# Altium PCB CP17E0276.PcbDoc (part 2 of 2)
Units mil, origin at the board's own origin, x right, y up, seen from the top; angles counter-clockwise.
Board outline 1745 x 3124.58 mil, 4 copper layers (Top Layer, Signal Layer 1, Signal Layer 2, Bottom Layer), stack 63.668 mil thick; 133 components, 83 nets, 411 pads, 139 vias.
Unrouted connection lines stored in the file: 11.
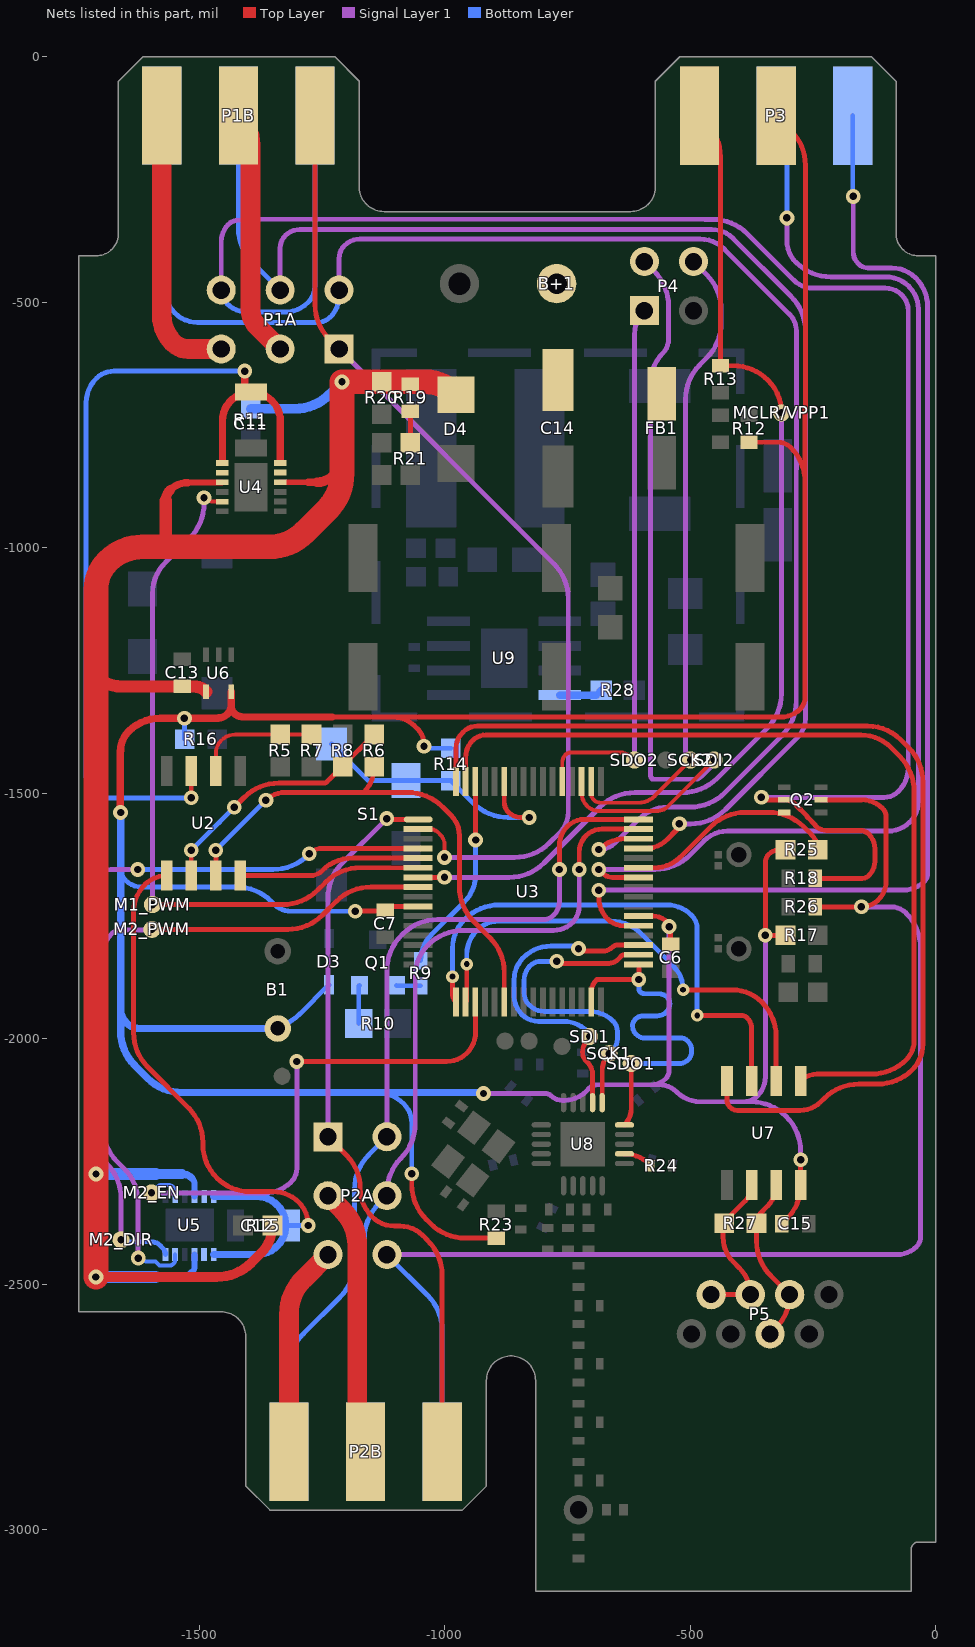
[diagram p4: the nets of this part, all layers, seen from the top]

## Via types
v1: diameter 30, hole 15, Top Layer to Bottom Layer, tented both sides, 94 vias
v2: diameter 25, hole 15, Top Layer to Bottom Layer, 16 vias
v3: diameter 30, hole 15, Top Layer to Bottom Layer, tented bottom, 14 vias
v4: diameter 30, hole 15, Top Layer to Bottom Layer, 6 vias
v5: diameter 24, hole 12, Top Layer to Bottom Layer, 5 vias
v6: diameter 25.59, hole 11.81, Top Layer to Bottom Layer, tented both sides, 4 vias

## Nets (pads, with @x,y where several pads share a name; then routed paths per layer and width w, separated by ;. In a path a pad name is that pad's centre, name@x,y a point inside that pad or via, vN(x,y) a via of type N, cw(c..) or ccw(c..) an arc to the next point about the centre after c; other vN are vias at no path point) (continued)
NetM1_PWM_0: M1_PWM.0 U3.6 U4.5 | length 1472.9
  Top Layer w8: v1(-1490,-898) ccw(c-1470.93,-878.93) -1470.93,-905.9 U4.5@-1453.07,-905.9
  Top Layer w10: M1_PWM.0@-1598,-1726.46 v3(-1595,-1726.46) -1329.68,-1726.46 ccw(c-1329.68,-1626.46) -1258.97,-1697.17 -1242.41,-1680.6 cw(c-1171.7,-1751.31) -1171.7,-1651.31 U3.6@-1053.82,-1651.31
  Signal Layer 1 w10: v3(-1595,-1726.46) -1595,-1093.18 cw(c-1505.24,-1093.18) -1568.71,-1029.71 -1519.29,-980.29 ccw(c-1590,-909.58) -1490,-909.58 v1(-1490,-898) v1@-1487.6,-900.4
NetM1H1_0: M1H1.0 P1A.4 P1B.4 U3.46 | length 3272.7
  Top Layer w10: v1(-686,-1614.34) cw(c-632.69,-1667.64) -632.69,-1592.26 U3.46@-605,-1592.26
  Signal Layer 1 w10: P1A.4@-1215,-475 -1215,-410.54 cw(c-1177.82,-410.54) -1204.11,-384.25 cw(c-1172.13,-416.23) -1172.13,-371 -479.94,-371 cw(c-479.94,-440.86) -430.54,-391.46 -298.03,-523.97 cw(c-332.89,-558.83) -283.59,-558.83 -284,-1125 -284,-1311.59 cw(c-384,-1311.59) -313.29,-1382.3 -429.49,-1498.5 cw(c-500.2,-1427.79) -500.2,-1527.79 -544.41,-1527.79 ccw(c-544.41,-1613.47) -605,-1552.89 -652.63,-1600.51 cw(c-686,-1567.14) v1(-686,-1614.34)
  Bottom Layer w10: P1B.4@-1576.04,-119.73 -1576.04,-456.81 ccw(c-1483.85,-456.81) -1549.04,-522 ccw(c-1503.17,-476.13) -1503.17,-541 -1259.56,-541 ccw(c-1259.56,-503.44) -1233,-530 ccw(c-1276.46,-486.54) -1215,-486.54 P1A.4@-1215,-475
NetM1H2_0: M1H2.0 P1A.5 P1B.5 U3.45 | length 2911
  Top Layer w10: U3.45@-605,-1611.94 -590.53,-1611.94 ccw(c-590.53,-1550.69) -547.22,-1594 -526.79,-1573.57 ccw(c-538.37,-1562) v1(-522,-1562)
  Signal Layer 1 w10: P1A.5@-1335,-475 -1335,-389.39 cw(c-1299.01,-389.39) -1324.46,-363.94 cw(c-1294.63,-393.78) -1294.63,-351.59 -1279.74,-351.59 -493.72,-351.55 -456.16,-351.55 cw(c-456.16,-412.3) -413.21,-369.34 -294.46,-488.09 cw(c-365.17,-558.8) -265.17,-558.8 -265.17,-1347.44 cw(c-319.1,-1347.44) -280.97,-1385.58 -428.1,-1532.71 cw(c-498.81,-1462) -498.81,-1562 v1(-522,-1562)
  Bottom Layer w10: P1B.5@-1420.06,-119.73 -1420.06,-348.52 ccw(c-1320.06,-348.52) -1390.77,-419.23 P1A.5@-1335,-475
NetM1HP_0: M1HP.0 P1A.1 P1B.1 U3.2 | length 2018.3
  Top Layer w8: U3.2@-1053.82,-1572.57 -1030.94,-1572.57 cw(c-1030.94,-1597.94) -1013.01,-1579.99 ; -1013,-1580 -1008.71,-1584.29 cw(c-1028.72,-1604.31) -1000.42,-1604.31 v1(-1000.42,-1630.31)
  Top Layer w10: P1B.1@-1264.07,-119.73 -1264.07,-504.51 ccw(c-1164.07,-504.51) -1234.78,-575.22 P1A.1@-1215,-595
  Signal Layer 1 w10: P1A.1@-1215,-595 -777.59,-1032.41 cw(c-848.3,-1103.12) -748.3,-1103.12 -748.3,-1537.95 cw(c-807.77,-1537.95) -765.72,-1580 -786.74,-1601.02 cw(c-857.45,-1530.31) -857.45,-1630.31 v1(-1000.42,-1630.31)
NetM2_0: M2.0 R6.1 U2.7 U3.22 | length 1063.6
  Top Layer w10: U2.7@-1466,-1667.3 v1(-1466,-1616) ; v1(-1364,-1514) cw(c-1325.54,-1552.46) -1325.54,-1498.07 -1165,-1498.07 ; R6.1@-1143.55,-1446 -1143.55,-1446.28 cw(c-1216.79,-1446.28) -1165,-1498.07 ; U3.22@-878.62,-1924.93 -878.62,-1864.4 ccw(c-978.62,-1864.4) -907.91,-1793.69 -940.71,-1760.89 cw(c-870,-1690.18) -970,-1690.18 -970,-1585.89 ccw(c-1028.14,-1585.89) -987.03,-1544.78 -1004.45,-1527.36 ccw(c-1075.16,-1598.07) -1075.16,-1498.07 -1165,-1498.07
  Bottom Layer w10: v1(-1466,-1616) v1(-1364,-1514)
NetM2_DIR_0: M2_DIR.0 U3.4 U5.6 | length 1534.2
  Top Layer w10: v1(-1276,-1623) cw(c-1249.3,-1649.7) -1249.3,-1611.94 U3.4@-1053.82,-1611.94
  Signal Layer 1 w10: v3(-1659.12,-2409) -1659.12,-2324.31 ccw(c-1759.12,-2324.31) -1688.41,-2253.59 -1693,-2249 cw(c-1627.82,-2183.82) -1720,-2183.82 -1720,-1706.38 cw(c-1660.93,-1706.38) -1702.7,-1664.61 cw(c-1679.49,-1687.82) -1679.49,-1655 v1@-1628,-1655
  Bottom Layer w10: v3(-1659.12,-2409) ccw(c-1649.46,-2399.34) -1649.46,-2413 -1597.16,-2413 cw(c-1597.16,-2437.53) -1579.82,-2420.18 -1574.03,-2425.97 cw(c-1587.01,-2438.95) U5.6@-1568.66,-2438.95 ; v1@-1628,-1655 v1(-1625,-1655) -1349.42,-1655 ccw(c-1349.42,-1555) -1278.71,-1625.71 v1(-1276,-1623)
NetM2_EN_0: M2_EN.0 U3.19 U5.8 | length 1087.7
  Top Layer w8: U3.19@-937.68,-1942.26 U3.19@-937.68,-1924.93
  Top Layer w10: v1(-1301,-2046) -996.04,-2046 ccw(c-996.04,-1987.96) -955,-2029 ccw(c-998.82,-1985.18) -936.85,-1985.18 U3.19@-936.85,-1924.93
  Signal Layer 1 w10: v3(-1597,-2313.49) -1365.92,-2313.49 ccw(c-1365.92,-2238.07) -1312.59,-2291.4 ccw(c-1340.56,-2263.42) -1301,-2263.42 v1(-1301,-2046)
  Bottom Layer w8: v3(-1597,-2313.49) -1583.81,-2300.3 ; -1583.8,-2300.29 cw(c-1577.34,-2306.76) -1577.34,-2297.62 -1562.58,-2297.62 cw(c-1562.58,-2312.58) -1552,-2302 cw(c-1559.7,-2309.7) -1548.81,-2309.7 U5.8@-1548.81,-2320.88
NetM2_ID_0: M2_ID.0 Q2.3 R25.2 U3.43 | length 440.2
  Top Layer w10: U3.43@-605,-1651.31 -572.5,-1651.31 ccw(c-572.5,-1577.41) -520.24,-1629.66 -458.46,-1567.88 cw(c-387.75,-1638.59) -387.75,-1538.59 -339.83,-1538.59 cw(c-339.83,-1638.59) -269.12,-1567.88 -252.72,-1584.28 cw(c-283.43,-1614.99) R25.2@-240,-1614.99
NetM2_PWM_0: M2_PWM.0 U3.8 U5.5 | length 1439.9
  Top Layer w10: v3(-1596.18,-1777) -1319.42,-1777 ccw(c-1319.42,-1677) -1248.71,-1747.71 -1220.97,-1719.97 cw(c-1150.26,-1790.68) -1150.26,-1690.68 U3.8@-1053.82,-1690.68
  Signal Layer 1 w10: v1(-1624.16,-2446.34) -1624.16,-2333.77 ccw(c-1724.16,-2333.77) -1653.45,-2263.06 -1667.71,-2248.8 cw(c-1597,-2178.09) -1697,-2178.09 -1697,-1831.4 cw(c-1632.13,-1831.4) -1678,-1785.53 cw(c-1659.99,-1803.54) -1659.99,-1778.06 -1596.18,-1778.06 v3(-1596.18,-1777)
  Bottom Layer w8: v1(-1624.16,-2446.34) ccw(c-1608.07,-2430.25) -1608.07,-2453 -1591,-2453 cw(c-1591,-2457.14) -1588.07,-2454.21 -1580.54,-2461.74 -1561.62,-2461.74 ccw(c-1561.62,-2448.36) -1552.16,-2457.82 ccw(c-1559.86,-2450.13) -1548.97,-2450.13 U5.5@-1548.97,-2438.95
NetM2H1_0: M2H1.0 P2A.4 P2B.4 U3.48 | length 1788
  Top Layer w10: v1(-766.3,-1655) -766.3,-1606.36 cw(c-710.64,-1606.36) -750,-1567 cw(c-715.92,-1601.08) -715.92,-1552.89 U3.48@-605,-1552.89
  Signal Layer 1 w10: P2A.4@-1117.67,-2199.21 -1117.67,-1860.03 cw(c-1017.67,-1860.03) -1088.38,-1789.32 -1085.35,-1786.29 cw(c-1014.64,-1857) -1014.64,-1757 -799.73,-1757 ccw(c-799.73,-1726.27) -778,-1748 ccw(c-806.24,-1719.76) -766.3,-1719.76 v1(-766.3,-1655)
  Bottom Layer w10: P2B.4@-1317.14,-2840.69 -1317.14,-2671.23 cw(c-1217.14,-2671.23) -1287.85,-2600.52 -1212.87,-2525.54 ccw(c-1283.58,-2454.83) -1183.58,-2454.83 -1183.58,-2306.54 cw(c-1083.58,-2306.54) -1154.29,-2235.83 P2A.4@-1117.67,-2199.21
NetM2H2_0: M2H2.0 P2A.5 P2B.5 U3.47 | length 1671.1
  Top Layer w10: v1(-726,-1655) -726,-1619.45 cw(c-678.69,-1619.45) -712.14,-1586 cw(c-679.72,-1618.42) -679.72,-1572.57 U3.47@-605,-1572.57
  Signal Layer 1 w10: P2A.5@-1117.67,-2319.21 -1117.67,-2311.67 cw(c-1020.78,-2311.67) -1089.29,-2243.16 ccw(c-1160,-2172.45) -1060,-2172.45 -1060,-1871.19 cw(c-972.8,-1871.19) -1034.46,-1809.53 -1033.22,-1808.29 cw(c-962.51,-1879) -962.51,-1779 -778.46,-1779 ccw(c-778.46,-1724.62) -740,-1763.07 ccw(c-773.8,-1729.27) -726,-1729.27 v1(-726,-1655)
  Bottom Layer w10: P2B.5@-1161.15,-2840.69 cw(c-1155.14,-2834.67) -1163.65,-2834.67 -1163.65,-2406.61 cw(c-1063.65,-2406.61) -1134.36,-2335.9 P2A.5@-1117.67,-2319.21
NetM2HP_0: M2HP.0 P2A.1 P2B.1 U3.1 | length 1516.2
  Top Layer w10: P2A.1@-1237.67,-2199.21 -1199.85,-2237.02 cw(c-1266.83,-2304) -1172.11,-2304 ccw(c-1090.02,-2304) -1148.06,-2362.05 ccw(c-1102.31,-2316.29) -1102.31,-2381 -1090.87,-2381 cw(c-1090.87,-2445.87) -1045,-2400 -1034.46,-2410.54 cw(c-1105.17,-2481.25) -1005.17,-2481.25 P2B.1@-1005.17,-2840.69 ; v1(-1118,-1551.3) ccw(c-1114.17,-1547.47) -1114.17,-1552.88 U3.1@-1053.82,-1552.88
  Signal Layer 1 w10: P2A.1@-1237.67,-2199.21 -1237.67,-1712.39 cw(c-1137.67,-1712.39) -1208.38,-1641.67 v1(-1118,-1551.3)
NetMCLR/VPP1_0: MCLR/VPP1.0 P3.1 R13.1 U3.7 | length 2174.6
  Top Layer w10: U3.7@-1053.82,-1670.99 v1(-1000.42,-1671) ; P3.1@-480.91,-119.79 -467.52,-133.18 cw(c-538.23,-203.89) -438.23,-203.89 R13.1@-438.23,-629.08 -412.34,-629.08 cw(c-412.34,-729.08) -341.63,-658.37 -341.5,-658.5 cw(c-407.88,-724.89) v1(-314,-724.89)
  Signal Layer 1 w10: v1(-1000.42,-1671) -868.42,-1671 ccw(c-868.42,-1571) -797.71,-1641.71 -683.65,-1527.65 cw(c-612.94,-1598.36) -612.94,-1498.36 -515.95,-1498.36 ccw(c-515.95,-1398.36) -445.24,-1469.07 -343.29,-1367.12 ccw(c-414,-1296.41) -314,-1296.41 v1(-314,-724.89)
NetP1A_2: P1A.2 P1B.2 U4.11 | length 504.7
  Top Layer w40: P1B.2@-1420.06,-119.73 cw(c-1479.41,-179.08) -1395.47,-179.08 -1395.47,-513.79 ccw(c-1345.4,-513.79) -1380.81,-549.19 P1A.2@-1335,-595
NetP1A_3: P1A.3 P1B.3 U4.2 | length 569.9
  Top Layer w40: P1B.3@-1576.04,-119.73 -1576.04,-526.38 ccw(c-1497.38,-526.38) -1553,-582 ccw(c-1521.62,-550.62) -1521.62,-595 P1A.3@-1455,-595
NetP1A_6: P1A.6 P1B.6 Q2.2 R18.2 | length 3906.9
  Top Layer w10: v1(-355,-1508) ccw(c-342.93,-1495.93) -342.93,-1513 Q2.2@-308.4,-1513 cw(c-308.4,-1545.3) -285.56,-1522.46 -261.81,-1546.2 ccw(c-258.28,-1546.21) -260.77,-1548.71 -246.07,-1563.41 cw(c-248.67,-1566) -245,-1566 ccw(c-222.22,-1543.22) -222.22,-1575.44 -154.37,-1575.44 cw(c-154.37,-1601.26) -136.11,-1583 cw(c-165.33,-1612.23) -124,-1612.23 -124,-1638.03 cw(c-164.97,-1638.03) -136,-1667 cw(c-150.48,-1652.51) -150.48,-1673 R18.2@-245.44,-1673
  Signal Layer 1 w10: P1A.6@-1455,-475 -1455,-376.36 cw(c-1404.99,-376.36) -1440.35,-341 cw(c-1420.34,-361.01) -1420.34,-332.71 -1397.76,-332.71 ; -1397.76,-330.71 -469.96,-331 -454.42,-331 cw(c-454.42,-431) -383.71,-360.29 -289.24,-454.76 ccw(c-250.04,-415.57) -250.04,-471 -102.8,-471 cw(c-102.8,-518.8) -69,-485 cw(c-100.38,-516.38) -56,-516.38 -56,-1447.58 cw(c-124.47,-1447.58) -76.05,-1496 cw(c-105.02,-1467.03) -105.02,-1508 v1(-355,-1508)
  Bottom Layer w10: P1A.6@-1455,-475 ccw(c-1416.37,-475) -1443.69,-502.31 ccw(c-1400.99,-459.62) -1400.99,-520 -1326.48,-520 ccw(c-1326.48,-451.24) -1277.86,-499.86 ccw(c-1310.18,-467.54) -1264.47,-467.54 -1264.47,-120.14 P1B.6@-1264.07,-119.73
NetP2A_2: P2A.2 P2B.2 U5.11 | length 500.8
  Top Layer w40: P2A.2@-1237.67,-2319.21 -1207.43,-2349.45 cw(c-1278.14,-2420.16) -1178.14,-2420.16 P2B.2@-1178.14,-2799.69
NetP2A_3: P2A.3 P2B.3 U5.2 | length 390.4
  Top Layer w40: P2B.3@-1317.14,-2801 -1317.14,-2560.1 cw(c-1217.14,-2560.1) -1287.85,-2489.39 P2A.3@-1237.67,-2439.21
NetP2A_6: P2A.6 P2B.6 Q2.5 R26.1 | length 2765.3
  Top Layer w10: R26.1@-245.44,-1731.01 v1(-151.3,-1731.01) -150.82,-1731.01 ccw(c-150.82,-1683.18) -117,-1717 ccw(c-155.63,-1678.37) -101,-1678.37 -101,-1547.42 ccw(c-124.46,-1547.42) -107.87,-1530.83 ccw(c-150.92,-1573.88) -150.92,-1513 Q2.5@-233.6,-1513
  Signal Layer 1 w10: P2A.6@-1117.67,-2439.21 -78.62,-2439.21 ccw(c-78.62,-2383.17) -39,-2422.8 ccw(c-58.31,-2403.48) -31,-2403.48 -31,-1814.4 ccw(c-131,-1814.4) -60.29,-1743.69 ccw(c-90.91,-1774.31) -90.91,-1731.01 v1(-151.3,-1731.01)
  Bottom Layer w10: P2A.6@-1117.67,-2439.21 -1034.46,-2522.41 cw(c-1105.17,-2593.12) -1005.17,-2593.12 P2B.6@-1005.17,-2840.69
NetP3_4: P3.4 U3.37 | length 2464.6
  Top Layer w10: v1(-686,-1697) -686,-1712.84 ccw(c-625.26,-1712.84) -668.21,-1755.79 ccw(c-635.31,-1722.89) -635.31,-1769.42 U3.37@-605,-1769.42
  Signal Layer 1 w10: v1(-686,-1697) -66.46,-1697 ccw(c-66.46,-1635.54) -23,-1679 ccw(c-38.98,-1663.02) -16.38,-1663.02 -16.38,-509 ccw(c-99.38,-509) -40.69,-450.31 ccw(c-90.08,-499.7) -90.08,-429.85 -138.04,-429.85 cw(c-138.04,-403.04) -157,-422 -158.1,-420.9 cw(c-134.2,-397) -168,-397 v1(-168,-284.19)
  Bottom Layer w10: P3.4@-168.94,-119.79 -168.94,-281.91 ccw(c-165.72,-281.91) v1(-168,-284.19)
NetP3_5: P3.5 U3.42 | length 2344.4
  Top Layer w10: v1(-686,-1655) v1@-678.43,-1662.57 ; v1@-678.42,-1662.58 ccw(c-658.09,-1642.22) -658.09,-1670.99 U3.42@-605,-1670.99
  Signal Layer 1 w10: v1(-686,-1655) -571.65,-1655 ccw(c-571.65,-1555) -500.94,-1625.71 -471.52,-1596.29 cw(c-424.25,-1643.56) -424.25,-1576.71 -96.81,-1576.71 ccw(c-96.81,-1514.09) -52.54,-1558.37 ccw(c-94.18,-1516.73) -35.29,-1516.73 -35.29,-513.75 ccw(c-99.98,-513.75) -54.24,-468 ccw(c-102.52,-516.28) -102.52,-448 -213.58,-448 cw(c-213.58,-348) -284.29,-418.71 -285.17,-417.83 cw(c-242.13,-374.79) -303,-374.79 v1(-303,-328)
  Bottom Layer w10: v1(-303,-328) P3.5@-303,-172.73
NetP4_1: P4.1 SDO2.0 U3.53 | length 1123.7
  Top Layer w8: U3.53@-760.51,-1476.11 -760.51,-1437.12 cw(c-737.72,-1437.12) -753.84,-1421 cw(c-743.37,-1431.47) -743.37,-1416.66 -643.18,-1416.66 cw(c-643.18,-1451.54) SDO2.0@-618.53,-1426.87 ; SDO2.0@-618.52,-1426.88 v3(-613.4,-1432)
  Signal Layer 1 w10: v3(-613.4,-1432) -613.4,-565.64 cw(c-544.62,-565.64) P4.1@-593.25,-517
NetP4_3: P4.3 SDI2.0 U3.51 | length 1581.1
  Top Layer w8: U3.51@-721.14,-1476.11 -721.14,-1499.49 ccw(c-685.33,-1499.49) -710.65,-1524.82 -708.74,-1526.73 ccw(c-687.78,-1505.77) -687.78,-1535.41 -565.98,-1535.41 ccw(c-565.98,-1508.28) -546.79,-1527.46 v3(-451.33,-1432)
  Signal Layer 1 w10: P4.3@-593.25,-417 -573.29,-436.97 cw(c-644,-507.68) -544,-507.68 -544,-575.03 cw(c-584.97,-575.03) -556,-604 ccw(c-495.9,-664.1) -580.89,-664.1 -580.89,-1462.76 ccw(c-571.01,-1462.76) -578,-1469.75 ccw(c-574.65,-1466.4) -574.65,-1471.14 -490.5,-1471.14 ccw(c-490.5,-1453.59) -478.09,-1466 -456.45,-1444.36 ccw(c-468.82,-1432) v3(-451.33,-1432)
NetP4_4: P4.4 SCK2.0 U3.50 | length 1326.7
  Top Layer w8: U3.50@-701.46,-1476.11 -701.46,-1500.38 ccw(c-683.02,-1500.38) -696.06,-1513.42 ccw(c-682.59,-1499.95) -682.59,-1519 -605.94,-1519 ccw(c-605.94,-1470.19) -571.43,-1504.7 cw(c-569.56,-1504.7) -570.88,-1503.38 v3(-499.5,-1432)
  Signal Layer 1 w10: v3@-509.5,-1432 -509.5,-697.66 cw(c-409.5,-697.66) -480.21,-626.95 -466.12,-612.87 ccw(c-536.84,-542.16) -436.84,-542.16 -436.84,-514.84 ccw(c-536.84,-514.84) -466.12,-444.13 P4.4@-493.25,-417
NetP5_1: P5.1 P5.2 R27.2 U7.6 | length 339.2
  Top Layer w10: P5.1@-457.5,-2520.58 P5.2@-377.5,-2520.58 ccw(c-454.1,-2520.58) -399.93,-2466.42 -412.25,-2454.1 cw(c-362.14,-2404) -433,-2404 -433,-2396.11 cw(c-382.03,-2396.11) -418.07,-2360.07 -388.52,-2330.52 ccw(c-421.16,-2297.88) U7.6@-375,-2297.88
NetP5_3: P5.3 P5.6 R27.1 U7.7 | length 351.5
  Top Layer w10: P5.6@-337.5,-2600.58 -325.78,-2588.86 ccw(c-394.07,-2520.58) P5.3@-297.5,-2520.58 -335.71,-2482.37 cw(c-265,-2411.66) -365,-2411.66 R27.1@-365,-2375 cw(c-336.03,-2375) -356.51,-2354.51 -342.76,-2340.76 ccw(c-385.65,-2297.88) U7.7@-325,-2297.88
NetQ1_2: Q1.2 R10.2 | length 78.5
  Bottom Layer w10: R10.2@-1174.94,-1968.66 -1174.94,-1892.3 Q1.2@-1173.4,-1890.77
NetQ1_3: Q1.3 R9.2 | length 50.1
  Bottom Layer w10: Q1.3@-1098.6,-1890.77 -1097.61,-1891.76 R9.2@-1048.87,-1891.76
NetR5_2: R5.2 R7.1 U2.2 | length 249.9
  Top Layer w8: U2.2@-1466,-1454.7 -1466,-1418.64 cw(c-1428.33,-1418.64) -1454.97,-1392 cw(c-1425.99,-1420.97) -1425.99,-1380 R5.2@-1335,-1380 R7.1@-1273.9,-1380
NetR6_2: R6.2 R8.1 U2.6 | length 517
  Top Layer w10: U2.6@-1516,-1667.3 v1(-1516,-1616) ; v1(-1428.29,-1528) -1408.58,-1508.29 cw(c-1337.87,-1579) -1337.87,-1479 -1246.1,-1479 ccw(c-1246.1,-1470.38) -1240,-1476.47 -1233.28,-1469.75 ; -1233.28,-1469.73 -1208.46,-1444.91 R6.2@-1143.55,-1380
  Bottom Layer w10: v1(-1516,-1616) -1458.83,-1558.83 -1458.83,-1558.54 v1(-1428.29,-1528)
NetR9_1: R9.1 U3.62 | length 404.5
  Top Layer w10: U3.62@-937.68,-1476.11 cw(c-939.31,-1477.75) -937,-1477.75 v1(-937,-1595)
  Bottom Layer w10: R9.1@-1048.87,-1840.57 cw(c-974.3,-1840.57) -1027.03,-1787.84 -959.29,-1720.1 ccw(c-1013.1,-1666.29) -937,-1666.29 v1(-937,-1595)
NetR11_1: R11.1 U2.3 U4.1 U4.12 | length 1820.4
  Top Layer w10: v1(-1516,-1509) U2.3@-1516,-1454.7
  Top Layer w15: U4.1@-1452.54,-825.3 -1452.54,-741.59 cw(c-1393.54,-741.59) R11.1@-1394.72,-682.6 ; v1(-1407.32,-640) -1407.32,-670 R11.1@-1394.72,-682.6 ; R11.1@-1394.54,-682.78 R11.1@-1394.72,-682.6 ; R11.1@-1393.62,-682.75 cw(c-1393.62,-741.75) -1334.62,-741.75 U4.12@-1334.62,-825.46
  Bottom Layer w10: v1(-1516,-1509) -1691.86,-1509 cw(c-1691.86,-1474.86) -1716,-1499 cw(c-1682.12,-1465.12) -1730.03,-1465.12 -1730.03,-704.45 cw(c-1660.1,-704.45) -1709.55,-655 cw(c-1673.34,-691.21) -1673.34,-640 v1(-1407.32,-640) ; v1@-1407.32,-641 v1@-1403,-641
NetR14_1: R14.1 S1.0 S1.1 U3.59 UP.0 | length 569.8
  Top Layer w10: U3.59@-878.62,-1476.11 -878.62,-1517.78 ccw(c-849.19,-1517.78) -870,-1538.59 ccw(c-844.87,-1513.46) -844.87,-1549 v1(-828,-1549)
  Bottom Layer w10: S1.1@-1230.46,-1399.18 -1155.66,-1473.98 S1.0@-1078.89,-1473.98 R14.1@-987.35,-1473.98 -941.62,-1519.71 ccw(c-870.91,-1449) -870.91,-1549 v1(-828,-1549)
NetR15_1: R15.1 U2.5 U5.1 U5.12 | length 1356.9
  Top Layer w10: U2.5@-1566,-1667.3 ccw(c-1566,-1730.28) -1610.54,-1685.75 ccw(c-1555.34,-1740.94) -1633.4,-1740.94 -1633.4,-1987.18 ccw(c-1533.4,-1987.18) -1604.11,-2057.89 -1521.81,-2140.19 cw(c-1592.52,-2210.9) -1492.52,-2210.9 -1492.52,-2214.14 ccw(c-1395.14,-2214.14) -1464,-2283 ccw(c-1396.4,-2215.4) -1396.4,-2311 -1349.06,-2311 cw(c-1349.06,-2384.18) -1297.32,-2332.43 cw(c-1344.76,-2379.88) v1(-1277.67,-2379.88) v1@-1277.67,-2367.76
  Bottom Layer w10: R15.1@-1319.69,-2379.88 v1(-1277.67,-2379.88)
  Bottom Layer w15: U5.12@-1470.07,-2320.88 -1382.69,-2320.88 cw(c-1382.69,-2379.88) R15.1@-1323.69,-2379.88 ; U5.1@-1469.91,-2439.02 -1382.69,-2439.02 ccw(c-1382.69,-2380.02) R15.1@-1323.69,-2380.02
NetR19_1: R19.1 R21.1 | length 63.5
  Top Layer w10: R21.1@-1069.99,-785.63 R19.1@-1069.99,-722.17
NetR24_1: R24.1 U8.17 | length 70.1
  Top Layer w10: U8.17@-624.38,-2234.06 U8.17@-633.89,-2234.06 cw(c-633.89,-2306.12) -582.94,-2255.16 R24.1@-580.15,-2257.95
NetR28_2: R28.2 U9.4 | length 89
  Bottom Layer w15: U9.4@-765.81,-1299.74 -690.77,-1299.74 R28.2@-680.93,-1289.89
NetSCK1_0: SCK1.0 U3.34 U8.1 | length 673.9
  Top Layer w10: v1(-772,-1842) ccw(c-762.34,-1832.34) -762.34,-1846 -665.4,-1846 ccw(c-665.4,-1821.11) -647.81,-1838.71 -640.5,-1831.41 cw(c-633.42,-1838.49) -633.42,-1828.48 U3.34@-605,-1828.48 ; U8.1@-679.17,-2129.73 -679.17,-2064.25 cw(c-630.8,-2064.25) v3(-665,-2030.05)
  Bottom Layer w10: v1(-772,-1842) -804.27,-1842 ccw(c-804.27,-1872.73) -826,-1851 ccw(c-796.14,-1880.86) -838.37,-1880.86 -838.37,-1905.96 ccw(c-802.96,-1905.96) -828,-1931 ccw(c-796.62,-1899.62) -796.62,-1944 -705.08,-1944 cw(c-705.08,-2012.87) -656.38,-1964.17 cw(c-675.74,-1983.54) -648.35,-1983.54 -648.35,-2001 cw(c-678.3,-2001) -657.12,-2022.17 v3(-665,-2030.05)
NetSDI1_0: SDI1.0 U3.35 U8.2 | length 673.6
  Top Layer w10: v1(-727.5,-1816) ccw(c-715.43,-1803.93) -715.43,-1821 -677.59,-1821 ccw(c-677.59,-1793.69) -658.27,-1813 cw(c-648.11,-1823.16) -648.11,-1808.79 U3.35@-605,-1808.79 U3.35@-604.79,-1809 ; v3(-705,-1995.05) cw(c-709.71,-1995.05) -706.38,-1998.38 -708,-2000 ccw(c-680.98,-2027.02) -719.19,-2027.02 ccw(c-693.04,-2027.02) -711.53,-2045.51 -708.37,-2048.68 cw(c-731.33,-2071.64) -698.85,-2071.64 U8.2@-698.85,-2129.73
  Bottom Layer w10: v1(-727.5,-1816) ccw(c-739.57,-1828.07) -739.57,-1811 -784,-1811 ccw(c-784,-1888.96) -839.13,-1833.83 -840.29,-1835 ccw(c-795.85,-1879.45) -858.7,-1879.45 -858.7,-1912.26 ccw(c-805.5,-1912.26) -843.12,-1949.88 -842.85,-1950.15 ccw(c-809,-1916.3) -809,-1964.17 -758.89,-1964.17 cw(c-758.89,-2034.33) -709.28,-1984.72 cw(c-719.61,-1995.05) v3(-705,-1995.05) v3@-706.59,-1993.46
NetSDO1_0: SDO1.0 U3.31 U3.33 U8.20 | length 784.2
  Top Layer w10: U3.31@-701.46,-1924.93 -701.46,-1905.24 cw(c-665.76,-1905.24) -691,-1880 cw(c-688.59,-1882.41) -688.59,-1879 v1(-604.65,-1879) -604.65,-1849.96 cw(c-601.33,-1849.96) -603.68,-1847.61 ccw(c-603.68,-1849.48) U3.33@-605,-1848.16 ; U8.20@-633.89,-2175 ccw(c-667.43,-2141.46) -620,-2141.46 v3(-620,-2050.05)
  Bottom Layer w10: v3(-620,-2050.05) -522.58,-2050.05 ccw(c-522.58,-2023.78) -504,-2042.36 ccw(c-520.9,-2025.46) -497,-2025.46 -497,-2023.31 ccw(c-524.31,-2023.31) -505,-2004 ccw(c-519.49,-2018.49) -519.49,-1998 -591.76,-1998 cw(c-591.76,-1971.73) -610.33,-1990.31 cw(c-593.43,-1973.41) -617.33,-1973.41 cw(c-597.85,-1973.41) -611.63,-1959.63 cw(c-595.63,-1975.63) -595.63,-1953 -567,-1953 ccw(c-567,-1926.73) -548.42,-1945.31 ccw(c-565.32,-1928.41) -541.42,-1928.41 ccw(c-560.91,-1928.41) -547.13,-1914.63 ccw(c-563.13,-1930.63) -563.13,-1908 -592.41,-1908 cw(c-592.41,-1894.34) -602.06,-1904 cw(c-595.81,-1897.75) -604.65,-1897.75 v1(-604.65,-1879)
NetU2_8: U2.8 U3.5 | length 371.7
  Top Layer w10: U2.8@-1416,-1667.3 -1273.31,-1667.3 ccw(c-1273.31,-1633.83) -1249.64,-1657.5 cw(c-1187.18,-1719.96) -1187.18,-1631.62 U3.5@-1053.82,-1631.62
NetU3_17: U3.17 U7.3 | length 1093.4
  Top Layer w10: v6(-984,-1873) -984,-1908.15 ccw(c-960.26,-1908.15) U3.17@-977.05,-1924.93 U3.17@-977,-1924.88 ; v6(-485.82,-1952) -396.07,-1952 cw(c-396.07,-1969.07) -384,-1957 cw(c-405.73,-1978.73) -375,-1978.73 U7.3@-375,-2085.28
  Bottom Layer w10: v6(-984,-1873) -984,-1815.95 cw(c-899.63,-1815.95) -959.29,-1756.29 cw(c-888.58,-1827) -888.58,-1727 -548.12,-1727 cw(c-548.12,-1798.7) -497.42,-1748 cw(c-525.43,-1776.01) -485.82,-1776.01 v6(-485.82,-1952)
NetU3_18: U3.18 U7.2 | length 980.9
  Top Layer w10: U3.18@-957.04,-1924.61 U3.18@-957.36,-1924.93 ccw(c-963.06,-1919.23) -955,-1919.23 v6(-955,-1847.47) ; v6(-514.4,-1900) -414.36,-1900 cw(c-414.36,-1985.36) -354,-1925 cw(c-424.01,-1995.01) -325,-1995.01 U7.2@-325,-2085.28
  Bottom Layer w10: v6(-955,-1847.47) -955,-1828.42 cw(c-885.9,-1828.42) -934.76,-1779.56 -933.2,-1778 cw(c-889.75,-1821.46) -889.75,-1760 -662,-1760 cw(c-662,-1847.85) -599.88,-1785.73 -534.75,-1850.86 cw(c-583.89,-1900) v6(-514.4,-1900)
NetU3_63: U3.63 U7.1 | length 1831.7
  Top Layer w10: U3.63@-957,-1476.47 U3.63@-957.36,-1476.11 -957.36,-1426.75 cw(c-908.22,-1426.75) -942.97,-1392 ; -942.94,-1391.97 cw(c-916.41,-1418.56) -916.41,-1381 -152.37,-1381 cw(c-152.37,-1466.51) -91.9,-1406.05 -73.29,-1424.66 cw(c-144,-1495.37) -44,-1495.37 -44,-2003.5 cw(c-98.95,-2003.5) -60.09,-2042.35 cw(c-130.81,-1971.64) -130.81,-2071.64 -242.08,-2071.64 ccw(c-242.08,-2118.2) U7.1@-275,-2085.28
NetU3_64: U3.64 U7.4 | length 2150.8
  Top Layer w10: U3.64@-977.05,-1476.11 -977.05,-1408 cw(c-933.17,-1408) -964.19,-1376.97 -961.73,-1374.51 cw(c-933.37,-1402.86) -933.37,-1362.76 -138.66,-1362.76 cw(c-138.66,-1457.93) -71.37,-1390.63 -55.29,-1406.71 cw(c-126,-1477.42) -26,-1477.42 -26,-2010.3 cw(c-100.12,-2010.3) -47.71,-2062.71 cw(c-118.42,-1992) -118.42,-2092 -156.58,-2092 ccw(c-156.58,-2192) -227.29,-2121.29 -234,-2128 cw(c-276.17,-2085.83) -276.17,-2145.47 -403.39,-2145.47 cw(c-403.39,-2123.39) -419,-2139 cw(c-404.51,-2124.51) -425,-2124.51 U7.4@-425,-2085.28
PWRIN: B+1.1 C11.2 C12.2 C13.1 C14.1 D4.2 FB1.2 R19.2 R20.1 U4.3 U4.10 U5.3 U5.10 U6.4 | length 4164.7
  Top Layer w12: -1522.79,-867 -1522,-867 cw(c-1520.86,-868.14) -1520.86,-866.53 U4.3@-1453.07,-866.53 ; U4.10@-1335,-866.37 -1277.75,-866.37
  Top Layer w15: -1559,-882 cw(c-1522.79,-918.21) -1522.79,-867 ; -1277.75,-866.37 -1260.13,-866.37
  Top Layer w20: v1(-1710.19,-2484.82) -1710.03,-2484.82 -1463.96,-2484.82 ccw(c-1463.96,-2384.82) -1393.25,-2455.53 -1373.92,-2436.2 ccw(c-1430.17,-2379.95) C12.2@-1350.62,-2379.95 ; -1568,-903.73 cw(c-1537.27,-903.73) -1559,-882 ; -1260.13,-866.37 ccw(c-1260.13,-818.65) -1226.39,-852.39 ccw(c-1268.07,-810.71) -1209.13,-810.71
  Top Layer w25: -1710.03,-1261 ccw(c-1658.91,-1209.88) -1658.91,-1282.17 C13.1@-1534.04,-1282.17 -1511.17,-1282.17 cw(c-1511.17,-1318.12) U6.4@-1485.75,-1292.7 ; -1568.5,-998 ccw(c-1569.69,-996.8) -1568,-996.8 -1568,-903.73
  Top Layer w50: v1@-1710.03,-2484.82 v1(-1710.03,-2275) -1710.03,-1261 -1710.03,-1084.61 cw(c-1628.97,-1084.61) -1686.29,-1027.29 cw(c-1615.58,-1098) -1615.58,-998 -1568.5,-998 -1356.81,-998 ccw(c-1356.81,-898) -1286.1,-968.71 -1238.42,-921.03 ccw(c-1309.13,-850.32) -1209.13,-850.32 -1209.13,-810.71 v1(-1209.13,-662) cw(c-1208.2,-662.93) -1208.2,-661.62 R20.1@-1128,-661.62 -1040.84,-661.62 cw(c-1040.84,-751.83) D4.2@-977.05,-688.04
  Bottom Layer w12: -1514.72,-2476.38 ccw(c-1527.06,-2464.03) -1509.6,-2464.03 U5.3@-1509.6,-2438.95 ; -1514.56,-2283.44 cw(c-1526.9,-2295.79) -1509.44,-2295.79 U5.10@-1509.44,-2320.88
  Bottom Layer w15: -1535.1,-2484.82 ccw(c-1535.1,-2456) -1514.72,-2476.38 ; -1534.94,-2275 cw(c-1534.94,-2303.83) -1514.56,-2283.44
  Bottom Layer w20: -1588.76,-2484.82 -1535.1,-2484.82 ; -1588.6,-2275 -1534.94,-2275 ; C11.2@-1394.54,-716.78 -1305.33,-716.78 ccw(c-1305.33,-616.78) -1234.62,-687.49 v1(-1209.13,-662)
  Bottom Layer w25: v1(-1710.19,-2484.82) -1588.76,-2484.82 ; v1(-1710.03,-2275) -1588.6,-2275
VCC: B1.1 C6.2 C7.2 C15.2 D3.2 P3.2 R12.2 R14.2 R16.1 R17.2 R23.1 R25.1 U3.10 U3.38 U6.5 U7.8 | length 8003.9
  Top Layer w10: -1228.43,-1344.73 -1105,-1344.73 ; v1(-1182,-1739.76) -1125.8,-1739.76 ccw(c-1125.8,-1733.48) C7.2@-1121.36,-1737.92 cw(c-1102.35,-1756.93) -1102.35,-1730.05 U3.10@-1053.82,-1730.05 ; v1(-1067,-2274.68) -1067,-2296.58 ccw(c-967,-2296.58) -1037.71,-2367.29 -1028.73,-2376.27 ccw(c-958.02,-2305.56) -958.02,-2405.56 R23.1@-895.27,-2405.56 ; v1(-1042,-1404) -1042,-1399.5 ccw(c-1084.24,-1399.5) -1054.37,-1369.63 -1061.07,-1362.93 ccw(c-1105,-1406.86) -1105,-1344.73 ; U3.38@-605,-1749.73 -575.94,-1749.73 cw(c-575.94,-1790.77) -546.93,-1761.75 cw(c-556.42,-1771.24) v1(-543,-1771.24) cw(c-550.24,-1778.49) -540,-1778.49 C6.2@-540,-1807.44 ; R12.2@-380.22,-784.89 -321.18,-784.89 cw(c-321.18,-821.92) -295,-795.73 cw(c-365.01,-865.75) -266,-865.75 ; P3.2@-324.93,-119.79 -294.82,-149.89 cw(c-365.54,-220.6) -265.54,-220.6 -265.54,-716.66 ; C15.2@-313.21,-2376.52 -303.59,-2366.9 ccw(c-372.61,-2297.88) U7.8@-275,-2297.88 v1(-275,-2246) ; R17.2@-306.02,-1789 v1(-347,-1789) -347,-1640.9 cw(c-323.1,-1640.9) -340,-1624 cw(c-318.27,-1645.73) -318.27,-1615 R25.1@-306,-1614.99 ; -266,-716.66 -266,-865.75 ; -1105,-1344.73 -315.97,-1344.73 ccw(c-315.97,-1288.53) -281.31,-1332.78 ccw(c-281.31,-1331.37) -280.32,-1332.37 -276.23,-1328.27 ccw(c-300.93,-1303.58) -266,-1303.58 -266,-865.75
  Top Layer w15: v1@-1661,-1539 -1661,-1413.04 ; -1660,-1413.04 cw(c-1604.37,-1413.04) -1643.71,-1373.71 cw(c-1579.23,-1438.18) -1579.23,-1347 -1530.26,-1347 v1(-1530,-1346.73) -1461.67,-1346.73 ccw(c-1461.67,-1344.23) -1459.9,-1346 ccw(c-1459.9,-1322.1) -1443,-1339 ccw(c-1463.35,-1318.65) -1434.57,-1318.65 ; U6.5@-1434.57,-1292.7 -1434.57,-1318.65 ; -1228.43,-1344.5 -1409.45,-1344.5 cw(c-1409.45,-1316.87) -1428.99,-1336.41 cw(c-1415.5,-1322.93) -1434.57,-1322.93 -1434.57,-1318.65
  Signal Layer 1 w10: v1(-921,-2111) -794.41,-2111 cw(c-794.41,-2125.65) -784.05,-2115.29 ccw(c-760.46,-2091.71) -760.46,-2125.06 -756.43,-2125.06 ccw(c-756.43,-2061.96) -711.81,-2106.58 -705.02,-2099.79 cw(c-689.45,-2115.36) -689.45,-2093.34 -579.68,-2093.34 ; v1(-543,-1771.24) -543,-2064.36 cw(c-566.53,-2064.36) -549.89,-2081 cw(c-579.68,-2051.22) -579.68,-2093.34 ; v1(-347,-1789) -347,-2077.37 cw(c-401.63,-2077.37) -363,-2116 cw(c-391.97,-2087.03) -391.97,-2128 ; v1(-275,-2246) -275,-2228.86 ccw(c-375,-2228.86) -304.29,-2158.15 -305.15,-2157.29 ccw(c-375.86,-2228) -375.86,-2128 -391.97,-2128 ; -579.68,-2093.34 -562.64,-2093.34 cw(c-562.64,-2142.64) -527.78,-2107.78 ccw(c-478.96,-2058.96) -478.96,-2128 -391.97,-2128
  Bottom Layer w10: -1660,-1653 ccw(c-1626.2,-1653) -1650.1,-1676.9 ccw(c-1616.83,-1643.63) -1616.83,-1690.68 -1423.62,-1690.68 cw(c-1423.62,-1790.68) -1352.9,-1719.97 -1347.22,-1725.66 ccw(c-1312.59,-1691.03) -1312.59,-1740 -1182.24,-1740 v1(-1182,-1739.76) ; v1@-1530,-1352.73 -1530,-1387.91 ccw(c-1527.61,-1387.91) R16.1@-1529.3,-1389.6 ; B1.1@-1366.08,-1978.74 ccw(c-1366.08,-1878.74) -1295.37,-1949.45 D3.2@-1235.7,-1889.79 ; -1138.97,-2109 cw(c-1138.97,-2187.53) -1083.44,-2132 cw(c-1123.13,-2171.69) -1067,-2171.69 v1(-1067,-2274.68) ; v1(-1042,-1404) ccw(c-1032.39,-1394.39) -1032.39,-1407.98 R14.2@-987.35,-1407.98 ; v1@-925.83,-2109 cw(c-925.83,-2115.83) v1(-921,-2111)
  Bottom Layer w15: v1(-1660,-1539) -1660,-1653 -1660,-1938.27 ; -1647.78,-1967.79 ccw(c-1621.33,-1941.34) -1621.33,-1978.74 -1366.08,-1978.74 B1.1@-1340.12,-1978.74 ; -1647.77,-1967.79 cw(c-1618.26,-1938.27) -1660,-1938.27 ; v1@-925.83,-2109 -1138.97,-2109 -1534.58,-2109 cw(c-1534.58,-2009) -1605.29,-2079.71 -1630.71,-2054.29 cw(c-1560,-1983.58) -1660,-1983.58 -1660,-1938.27
pads on no net: P3.6 U3.11 U3.12 U3.13 U3.14 U3.15 U3.16 U3.21 U3.25 U3.26 U3.27 U3.28 U3.32 U3.49 U3.54 U3.55 U3.56 U3.57 U3.58 U4.7 U5.7 U6.1 U6.3 XT2.2 XT2.4

## Polygon pours and split planes (outlines as drawn)
NetC1_2 on Bottom Layer "Top Layer-No Net" (solid, remove dead copper, pour order 48): -479,-2273 -479,-1938 -479,-1876 -479,-1786 -479,-1500 -499.5,-1479.5 -505,-1474 -916,-1474 -950,-1440 -957.97,-1432.03 -957.97,-1296.92 -479,-1296.92 -448.08,-1266 -433.08,-1251 -280,-1251 -265,-1266 -265,-2516 -302,-2553 -302,-2583 -302,-2640 -453.01,-2640 -476.5,-2640 -586,-2640 -601,-2625 -601,-2395
NetC38_1 on Bottom Layer "Top Layer-No Net" (solid, remove dead copper, pour order 46): -255.34,-1171 -29,-1171 -21,-1179 -9,-1191 -9,-2613 -21,-2625 -36,-2640 -281,-2640 -296,-2625 -296,-2583 -255.34,-2542.34
NetC38_1 on Bottom Layer "Top Layer-No Net" (solid, pour order 44): -227,-1171.08 -227,-1258 -255,-1258 -270,-1243 -699,-1243 -714,-1258 -812,-1258 -812,-1181.56 -803.65,-1171.08
NetP2A_3 on Bottom Layer "M2-" (solid, pour order 0): -1230.14,-2471.54 cw(c-1390.26,-2057.89) -1476.95,-2492.9 cw(c-1473.69,-2470.17) -1496.43,-2473.3 cw(c-1492.75,-2471.98) -1496.63,-2472.48 -1496.63,-2449.02 cw(c-1490.62,-2449.01) -1490.62,-2443 cw(c-1489.85,-2448.96) -1483.89,-2448.21 -1483.89,-2455.21 ccw(c-1325.9,-2429.05) -1481.67,-2466.21 ccw(c-1382.27,-2420.44) -1480.71,-2468.23 ccw(c-1385.64,-2374.18) -1479.69,-2469.25 ccw(c-1422.74,-2378.32) -1478.52,-2469.97 ccw(c-1394.62,-2333.19) -1476.95,-2470.92 ccw(c-1231.14,-1906.89) -1473.67,-2472.34 ccw(c-1464.6,-2329) -1471.14,-2472.48 ccw(c-1452.31,-2103.41) -1266.41,-2422.8 cw(c-1237.66,-2438.9) -1237.14,-2405.95 cw(c-1237.51,-2439.16)
NetP2A_2 on Bottom Layer "M2-" (solid, pour order 38): -1230.14,-2287.83 ccw(c-1390.26,-2701.49) -1476.95,-2266.47 ccw(c-1473.69,-2289.2) -1496.43,-2286.07 ccw(c-1492.75,-2287.4) -1496.63,-2286.9 -1496.63,-2310.36 ccw(c-1490.62,-2310.36) -1490.62,-2316.37 ccw(c-1489.85,-2310.41) -1483.89,-2311.17 -1483.89,-2304.17 cw(c-1325.9,-2330.33) -1481.67,-2293.17 cw(c-1382.27,-2338.94) -1480.71,-2291.14 cw(c-1385.64,-2385.19) -1479.69,-2290.13 cw(c-1422.74,-2381.05) -1478.52,-2289.41 cw(c-1394.62,-2426.19) -1476.95,-2288.45 cw(c-1231.14,-2852.48) -1473.67,-2287.04 cw(c-1464.6,-2430.38) -1471.14,-2286.9 cw(c-1452.31,-2655.97) -1266.41,-2336.58 ccw(c-1237.66,-2320.48) -1237.14,-2353.43 ccw(c-1237.51,-2320.22)
NetC1_2 on Bottom Layer "Top Layer-No Net" (solid, remove dead copper, pour order 32): -287,-915 -287,-1032 -372,-1032 -404,-1064 -404,-888.6 -377.6,-915
NetC1_2 on Bottom Layer "Top Layer-No Net" (solid, remove dead copper, pour order 11): -1157.2,-585 -380,-585 -380,-1159 -824,-1159 -824,-1275.89 -557,-1275.89 -424,-1275.89 -424,-1255 -380,-1255 -380,-1361 -1157.2,-1361
GND on Bottom Layer "Top Layer-No Net" (solid, pour order 50): -1745,-2555.69 -1745,-405 -1709.55,-405 ccw(c-1709.55,-359.69) -1664.23,-359.69 -1664.24,-359.69 -1664.24,-49.84 -1614.39,0 -1223.61,0 -1173.76,-49.84 -1173.76,-271.35 ccw(c-1123.5,-264.23) -1123.5,-315 -621.48,-315 ccw(c-621.48,-264.23) -571.22,-271.35 -571.22,-49.84 -521.37,0 -130.59,0 -80.75,-49.84 -80.75,-359.69 ccw(c-35.44,-359.69) -35.44,-405 0,-405 0,-3024.58 -35,-3024.58 ccw(c-35,-3039.58) -50,-3039.58 -50,-3124.58 -814.92,-3124.58 -814.92,-2695.58 ccw(c-864.92,-2695.58) -914.92,-2695.58 -914.92,-2910.58 -963.92,-2959.58 -1355.92,-2959.58 -1404.92,-2910.58 -1405.39,-2910.58 -1405.39,-2605.69 -1405.65,-2605.69 ccw(c-1455.65,-2605.69) -1455.65,-2555.69
NetP1A_2 on Top Layer "M2-" (solid, pour order 42): -1303.14,-587.36 cw(c-1716.8,-747.48) -1281.79,-834.17 cw(c-1304.51,-830.91) -1301.38,-853.65 cw(c-1302.71,-849.97) -1302.21,-853.85 -1325.67,-853.85 cw(c-1325.67,-847.84) -1331.68,-847.84 cw(c-1325.72,-847.07) -1326.48,-841.11 -1319.48,-841.11 ccw(c-1345.64,-683.12) -1308.48,-838.89 ccw(c-1354.25,-739.49) -1306.46,-837.93 ccw(c-1400.5,-742.87) -1305.44,-836.91 ccw(c-1396.36,-779.96) -1304.72,-835.74 ccw(c-1441.5,-751.84) -1303.77,-834.17 ccw(c-1867.8,-588.36) -1302.35,-830.89 ccw(c-1445.69,-821.82) -1302.21,-828.36 ccw(c-1671.28,-809.53) -1351.89,-623.63 cw(c-1335.79,-594.88) -1368.74,-594.36 cw(c-1335.53,-594.73)
NetP1A_3 on Top Layer "M2-" (solid, pour order 40): -1486.86,-587.36 ccw(c-1073.2,-747.48) -1508.21,-834.17 ccw(c-1485.49,-830.91) -1488.62,-853.65 ccw(c-1487.29,-849.97) -1487.79,-853.85 -1464.33,-853.85 ccw(c-1464.33,-847.84) -1458.32,-847.84 ccw(c-1464.28,-847.07) -1463.52,-841.11 -1470.52,-841.11 cw(c-1444.36,-683.12) -1481.52,-838.89 cw(c-1435.75,-739.49) -1483.54,-837.93 cw(c-1389.5,-742.87) -1484.56,-836.91 cw(c-1393.64,-779.96) -1485.28,-835.74 cw(c-1348.5,-751.84) -1486.23,-834.17 cw(c-922.2,-588.36) -1487.65,-830.89 cw(c-1344.31,-821.82) -1487.79,-828.36 cw(c-1118.72,-809.53) -1438.11,-623.63 ccw(c-1454.21,-594.88) -1421.26,-594.36 ccw(c-1454.47,-594.73)
NetC1_1 on Top Layer "Top Layer-No Net" (solid, pour order 34): -491.06,-954.06 -511.9,-933.22 -511.9,-780.1 -517,-775 -523,-769 -630.44,-769 -634.44,-773 -637.9,-776.46 -637.9,-932.96 -659,-954.06
PWRIN on Top Layer "Top Layer-No Net" (solid, pour order 30): -521.37,-583 -528.37,-576 -785,-576 -785,-702 -514,-702 -514,-590.37
PWRIN on Top Layer "Top Layer-No Net" (solid, pour order 28): -701.97,-729 -686.69,-579.28 -689.99,-575.99 -693.99,-571.99 -701.97,-564 -701.97,-457 -842,-457 -842,-564 -848,-571.99 -854,-579.28 -842,-729
PWRIN on Top Layer "Top Layer-No Net" (solid, pour order 18): -517,-742 -514,-739 -514,-664 -514,-622 -514,-590.37 -521.37,-583 -528.37,-576 -580.15,-576 -640,-576 -650.89,-727.27 -640,-738.16 -637.9,-740.26 -634.16,-744 -519,-744
PWRIN on Top Layer "Top Layer-No Net" (solid, pour order 16): -842,-548 -701.97,-548 -701.97,-462 -702.27,-462.03 ccw(c-771.99,-468.29) -841.71,-462.03 -842,-462
PWRIN on Top Layer "Top Layer-No Net" (solid, pour order 15): -1022.08,-725.92 -1019,-729 -621.48,-729 -621.48,-576 -1013,-576 -1018,-581 -1024,-587 -1024,-724
NetC1_2 on Top Layer "Top Layer-No Net" (solid, remove dead copper, pour order 13): -1199.12,-1325 -1209.93,-1314.19 -1209.93,-1159.54 -1205,-1154.62 -1199.12,-1148.73 -326.88,-1148.73 -321,-1154.62 -312.46,-1163.15 -312.46,-1318.46 -319,-1325 -325,-1331 -1193.12,-1331
NetC1_1 on Top Layer "Top Layer-No Net" (solid, pour order 12): -1199.53,-1094 -333.93,-1094 -312.46,-1072.54 -312.46,-964.46 -333.93,-943 -1199.53,-943 -1210,-953.47 -1210,-1018 -1210,-1083.53
GND on Top Layer "Top Layer-No Net" (solid, pour order 49): -1745,-2555.69 -1745,-405 -1709.55,-405 ccw(c-1709.55,-359.69) -1664.23,-359.69 -1664.24,-359.69 -1664.24,-49.84 -1614.39,0 -1223.61,0 -1173.76,-49.84 -1173.76,-271.35 ccw(c-1123.5,-264.23) -1123.5,-315 -621.48,-315 ccw(c-621.48,-264.23) -571.22,-271.35 -571.22,-49.84 -521.37,0 -130.59,0 -80.75,-49.84 -80.75,-359.69 ccw(c-35.44,-359.69) -35.44,-405 0,-405 0,-3024.58 -35,-3024.58 ccw(c-35,-3039.58) -50,-3039.58 -50,-3124.58 -814.92,-3124.58 -814.92,-2695.58 ccw(c-864.92,-2695.58) -914.92,-2695.58 -914.92,-2910.58 -963.92,-2959.58 -1355.92,-2959.58 -1404.92,-2910.58 -1405.39,-2910.58 -1405.39,-2605.69 -1405.65,-2605.69 ccw(c-1455.65,-2605.69) -1455.65,-2555.69
GND on Signal Layer 1 "Top Layer-No Net" (solid, pour order 51): -1745,-2555.69 -1745,-405 -1709.55,-405 ccw(c-1709.55,-359.69) -1664.23,-359.69 -1664.24,-359.69 -1664.24,-49.84 -1614.39,0 -1223.61,0 -1173.76,-49.84 -1173.76,-271.35 ccw(c-1123.5,-264.23) -1123.5,-315 -621.48,-315 ccw(c-621.48,-264.23) -571.22,-271.35 -571.22,-49.84 -521.37,0 -130.59,0 -80.75,-49.84 -80.75,-359.69 ccw(c-35.44,-359.69) -35.44,-405 0,-405 0,-3024.58 -35,-3024.58 ccw(c-35,-3039.58) -50,-3039.58 -50,-3124.58 -814.92,-3124.58 -814.92,-2695.58 ccw(c-864.92,-2695.58) -914.92,-2695.58 -914.92,-2910.58 -963.92,-2959.58 -1355.92,-2959.58 -1404.92,-2910.58 -1405.39,-2910.58 -1405.39,-2605.69 -1405.65,-2605.69 ccw(c-1455.65,-2605.69) -1455.65,-2555.69
GND on Signal Layer 2 "Top Layer-No Net" (solid, pour order 52): -1745,-2555.69 -1745,-405 -1709.55,-405 ccw(c-1709.55,-359.69) -1664.23,-359.69 -1664.24,-359.69 -1664.24,-49.84 -1614.39,0 -1223.61,0 -1173.76,-49.84 -1173.76,-271.35 ccw(c-1123.5,-264.23) -1123.5,-315 -621.48,-315 ccw(c-621.48,-264.23) -571.22,-271.35 -571.22,-49.84 -521.37,0 -130.59,0 -80.75,-49.84 -80.75,-359.69 ccw(c-35.44,-359.69) -35.44,-405 0,-405 0,-3024.58 -35,-3024.58 ccw(c-35,-3039.58) -50,-3039.58 -50,-3124.58 -814.92,-3124.58 -814.92,-2695.58 ccw(c-864.92,-2695.58) -914.92,-2695.58 -914.92,-2910.58 -963.92,-2959.58 -1355.92,-2959.58 -1404.92,-2910.58 -1405.39,-2910.58 -1405.39,-2605.69 -1405.65,-2605.69 ccw(c-1455.65,-2605.69) -1455.65,-2555.69

## Keep-outs
Keep-Out Layer:
  circle w3.94: c-1595,-2181.58 r65
  circle w3.94: c-145,-2181.58 r65
  circle w3.94: c-1595,-757.58 r65
  circle w3.94: c-145,-771.05 r65
  lines w3.94: -1405.65,-2605.69 ccw(c-1455.65,-2605.69) -1455.65,-2555.69 -1745,-2555.69 -1745,-529.73 -1745,-405 -1709.55,-405 ccw(c-1709.55,-359.69) -1664.23,-359.69 -1664.24,-49.84 -1614.39,0 -1223.61,0 -1173.76,-49.84 -1173.76,-271.35 ccw(c-1123.5,-264.23) -1123.5,-315 ; -1405.39,-2910.58 -1405.39,-2605.69 ; -1404.92,-2910.58 -1355.92,-2959.58 -963.92,-2959.58 -914.92,-2910.58 -914.92,-2695.58 cw(c-864.92,-2695.58) -814.92,-2695.58 -814.92,-3124.58 -50,-3124.58 -50,-3039.58 cw(c-35,-3039.58) -35,-3024.58 0,-3024.58 0,-405 -35,-405 ; -1123.56,-315 -621.43,-315 ; -621.48,-315 ccw(c-621.48,-264.23) -571.22,-271.35 -571.22,-49.84 -521.37,0 -130.59,0 -80.75,-49.84 -80.75,-359.69 ccw(c-35.44,-359.69) -35.44,-405

## Silkscreen, mask and mechanical layers (free items; w line width, h text height)
Mechanical 1:
  circle w10: c-582.49,-2797.58 r63.23
  circle w10: c-132.48,-2797.58 r63.23
  lines w10: -865.92,-2097.67 -832.06,-2124.67
Mechanical 5:
  lines w10: -1171.32,-1376.74 -1171.32,-566.73 -359.32,-566.73 -359.32,-1376.74 -1171.32,-1376.74 ; -1126.31,-1338.74 -1126.31,-596.73 -384.31,-596.74 -384.31,-1338.74 -1126.31,-1338.74
Mechanical 7:
  lines w10: -842,-462 -842,-548 -701.97,-548 -701.97,-462 ; -841.71,-462.03 cw(c-771.99,-468.29) -702.27,-462.03 ; -1209.93,-1345.73 -1209.93,-1148.73 -333.93,-1148.73 -333.93,-1345.73 -1209.93,-1345.73 ; -1209.93,-1103.73 -333.93,-1103.73 -333.93,-937.73 -1209.93,-937.73 -1209.93,-1103.73

## Text inside footprints (layer, text, board x,y; h text height)
U4: Top Overlay "+" at -1494.07,-839.21 h25
U5: Bottom Overlay "+" at -1482.29,-2479.95 h25 r270